# Altium PCB PCB1.PcbDoc (part 1 of 2)
Units mil, origin at the board's own origin, x right, y up, seen from the top; angles counter-clockwise.
Board outline 2698.82 x 2101.51 mil, 2 copper layers (Top Layer, Bottom Layer); 61 components, 56 nets, 231 pads, 29 vias.
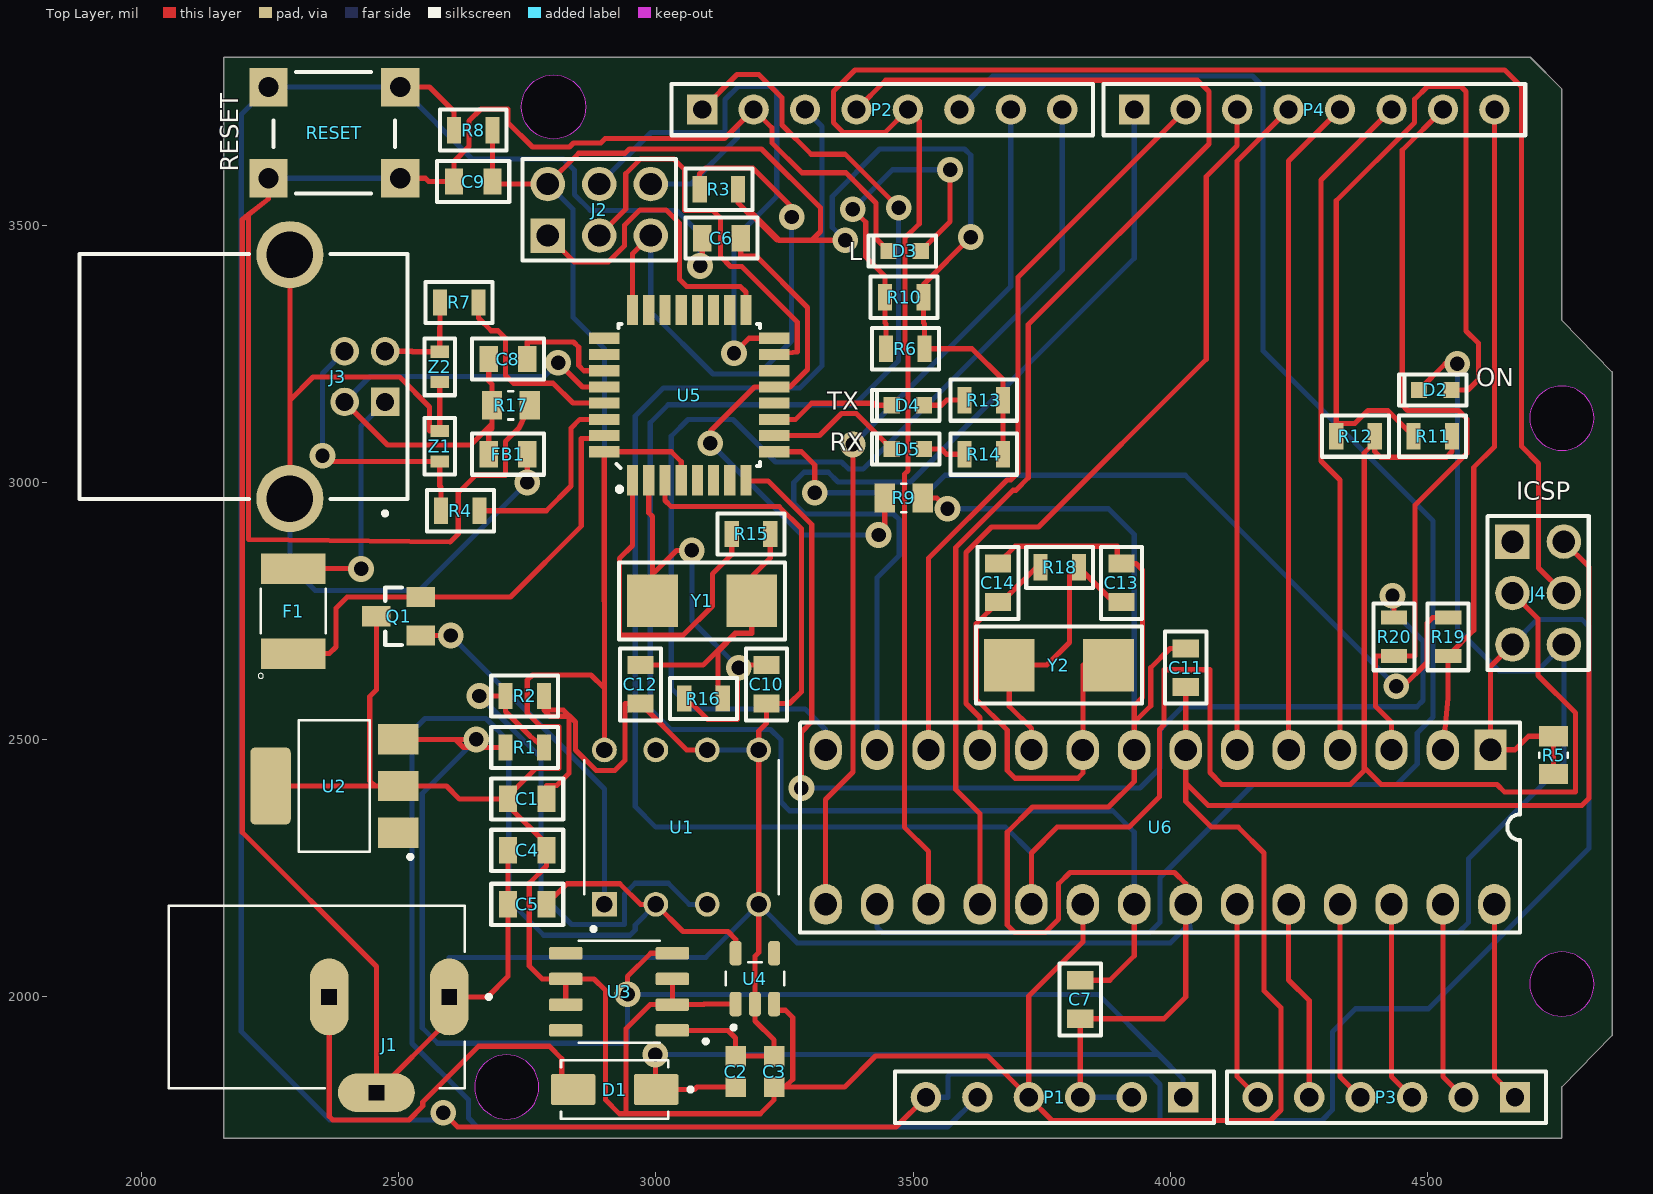
[diagram p0: Top Layer view]
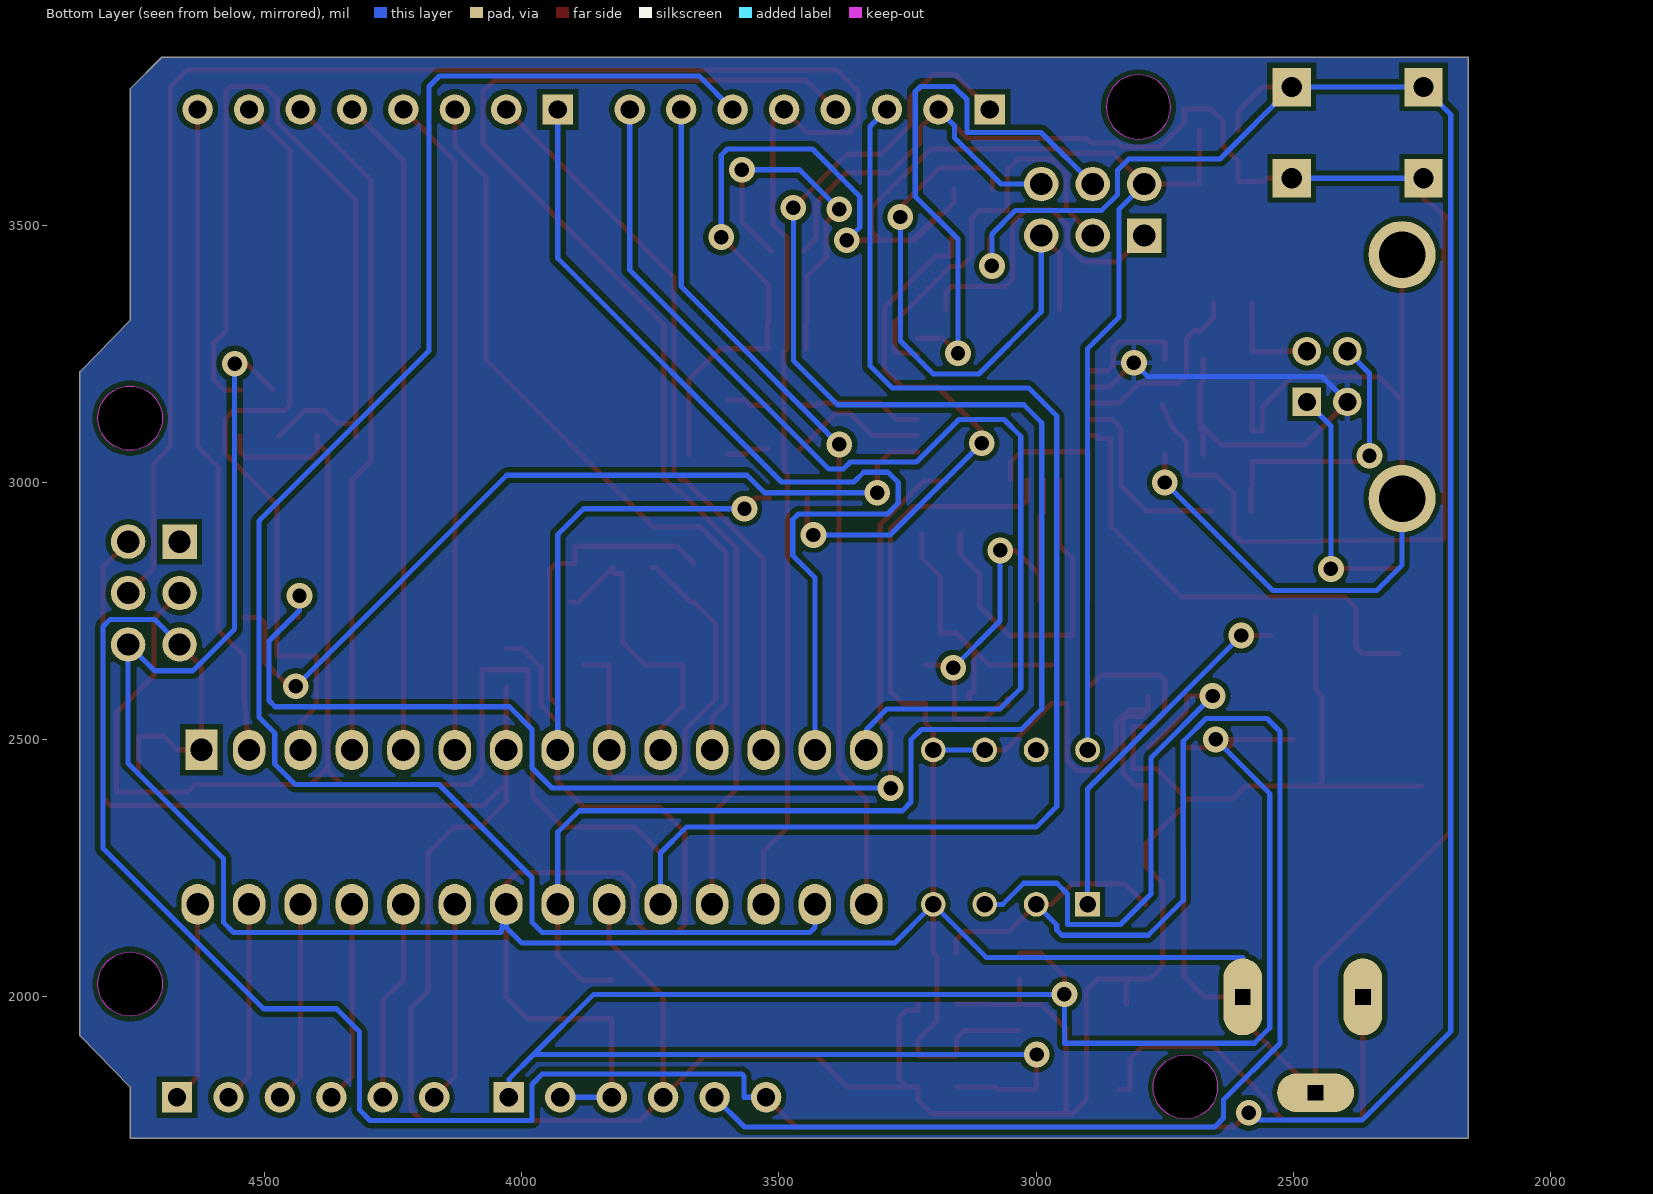
[diagram p1: Bottom Layer view, seen from below]
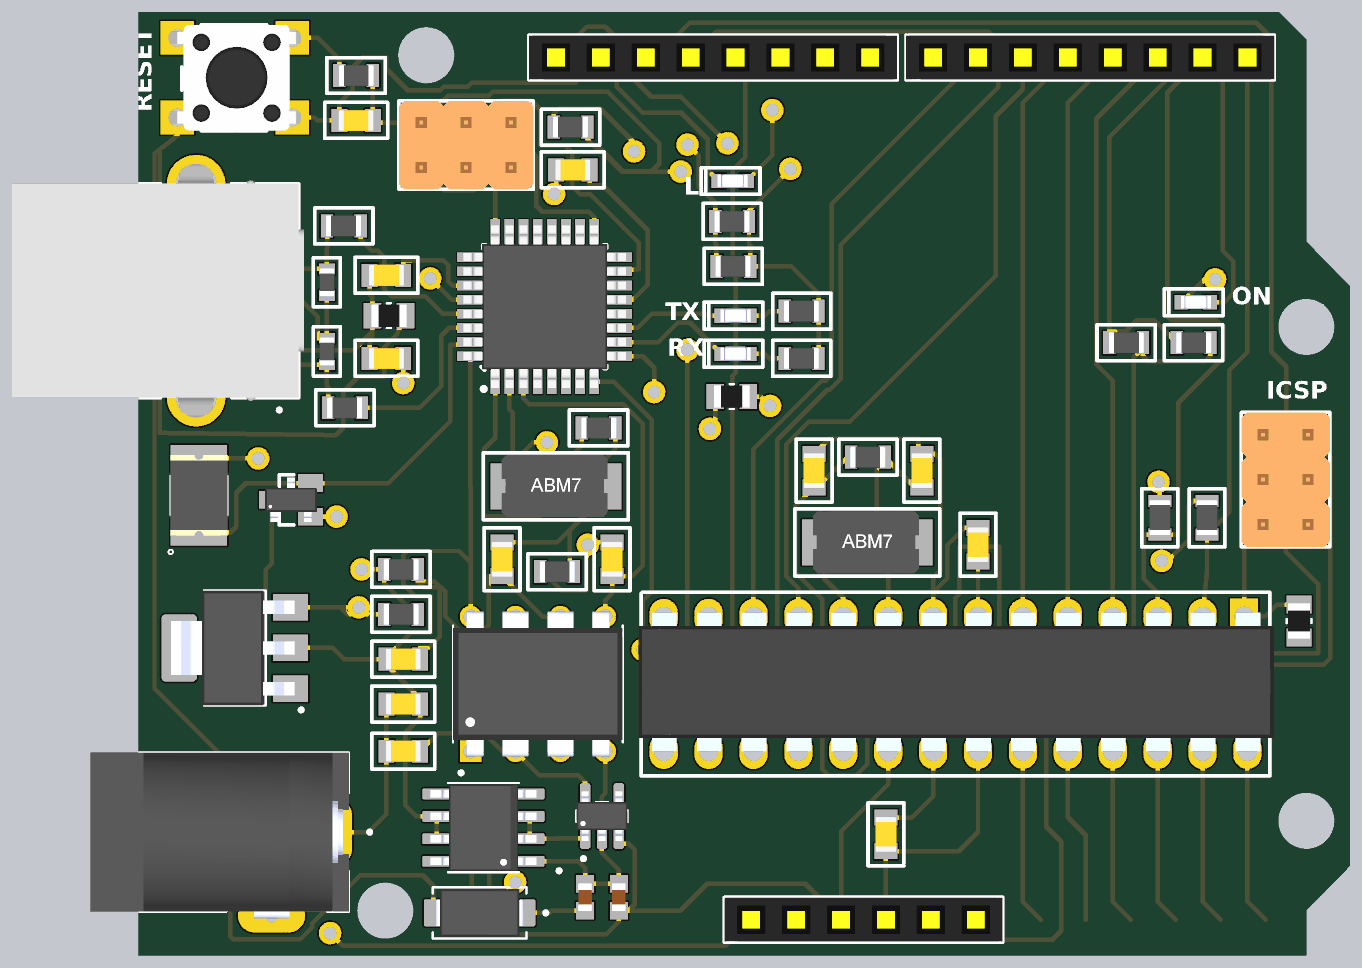
[diagram p2: 3D render of the assembled board from above, using the file's embedded part models]

## Layer stack, top to bottom
Top Solder: solder mask 0.4, Solder Resist, Dk 3.5
Top Layer: signal copper 1.4
Dielectric 1: dielectric 12.6, FR-4, Dk 4.8
Bottom Layer: signal copper 1.4
Bottom Solder: solder mask 0.4, Solder Resist, Dk 3.5

## Board outline
2160,1725 2160,3826.51 4699.58,3826.51 4761.18,3764.91 4761.18,3315 4858.82,3215 4858.82,1925 4761.18,1825 4761.18,1725
cut-out: 2801.18,3667.5 cw(c2801.18,3730) 2738.68,3730 cw(c2801.18,3730) 2801.18,3792.5 cw(c2801.18,3730) 2863.68,3730 cw(c2801.18,3730)
cut-out: 2647.5,1825 ccw(c2710,1825) 2710,1762.5 ccw(c2710,1825) 2772.5,1825 ccw(c2710,1825) 2710,1887.5 ccw(c2710,1825)
cut-out: 4698.68,2025 ccw(c4761.18,2025) 4761.18,1962.5 ccw(c4761.18,2025) 4823.68,2025 ccw(c4761.18,2025) 4761.18,2087.5 ccw(c4761.18,2025)
cut-out: 4698.68,3125 ccw(c4761.18,3125) 4761.18,3062.5 ccw(c4761.18,3125) 4823.68,3125 ccw(c4761.18,3125) 4761.18,3187.5 ccw(c4761.18,3125)

## Design rules (kind name [scope] priority, off if disabled: settings)
Clearance [All] p1: gap=10 ignorepadtopadclearanceinfootprint=FALSE
PolygonConnect [All] p1: connectstyle=Relief reliefconductorwidth=10 reliefentries=4 polygonreliefangle="90 Angle" airgapwidth=10
RoutingPriority [InNetClass('power')] p1: routingpriority=0
RoutingVias [All] p1: holewidth=28 width=50 viastyle="Through Hole" minholewidth=28 minwidth=50 maxholewidth=28 maxwidth=50
SolderMaskExpansion [All] p1: expansion=4 istentingtop=FALSE
Width [All] p1: maxlimit=10 minlimit=10 preferedwidth=10
29 further rules are at their usual default settings.

## Components (designator, comment, footprint, x,y, rotation, side; value= is the part's Value field where it differs from the comment)
C1 "100nF" C0805 2750,2385 r0 top
C2 "GRM188R60J476ME15D" CAPC1608X100N 3155,1855 r270 top
C3 "GRM188R60J476ME15D" CAPC1608X100N 3230,1855 r270 top
C4 "100nF" C0805 2750,2285 r0 top
C5 "1u/25V" C0805 2750,2180 r0 top
C6 "100nF" C0805 3127.6,3475 r0 top
C7 "100nF" C0805 3825,1995 r270 top
C8 "1u/25V" C0805 2712.6,3240 r0 top
C9 "100nF" C0805 2645,3585 r0 top
C10 "18p" C0805 3215,2607.6 r90 top
C11 "100nF" C0805 4030,2640 r270 top
C12 "18p" C0805 2970,2607.6 r90 top
C13 "18p" C0805 3905,2805 r270 top
C14 "18p" C0805 3665,2805 r270 top
D1 "M7" DIOM505270X240 2920,1820 r180 top
D2 "Orange" Orange_LED 4515,3180 r0 top
D3 "GREEN" Orange_LED 3483.5,3450 r0 top
D4 "TX" Orange_LED 3490,3150 r0 top
D5 "RX" Orange_LED 3490,3065 r0 top
F1 "FUSE" FUSM4632X85 2295,2750 r90 top
FB1 "" C0805 2712.6,3055 r180 top
J1 "PJ" MPD_EJ503A 2340.98,2000 r270 top
J2 "HDR 2x3" HDR_2x3_2.55mm 2790,3480 r90 top
J3 "USB TYPE-B" SAMTEC_USB-B-S-X-X-TH 2288.7,3205.79 r270 top
J4 "ICSP" HDR_2x3_2.55mm 4665,2885 r0 top
P1 "M-Header 6" "M-Header 6" 4965,2280 r180 top
P2 "M-Header 8" "M-Header 8" 2425,2935 r0 top
P3 "M-Header 6" "M-Header 6" 5610,2280 r180 top
P4 "M-Header 8" "M-Header 8" 3265,2935 r0 top
Q1 "FDN304P" SSOT-3 2500,2740 r90 top
R1 "10K" R0805 2745,2485 r180 top
R2 "10K" R0805 2745,2585 r180 top
R3 "10K" R0805 3122.6,3570 r0 top
R4 "22R" R0805 2620,2945 r0 top
R5 "0R" RESC2012X60N 4745,2470 r270 top
R6 "1K" R0805 3485,3260 r0 top
R7 "22R" R0805 2617.6,3350 r0 top
R8 "10K" R0805 2645,3685 r180 top
R9 "0R" RESC2012X60N 3481.81,2970 r0 top
R10 "1K" R0805 3482.6,3360 r0 top
R11 "1K" R0805 4510,3090 r180 top
R12 "1K" R0805 4360,3090 r180 top
R13 "1K" R0805 3637.4,3160 r0 top
R14 "1K" R0805 3637.4,3055 r0 top
R15 "22R" R0805 3185,2900 r180 top
R16 "1M" R0805 3092.6,2580 r180 top
R17 "0R" RESC2012X60N 2718.19,3150 r0 top
R18 "1M" R0805 3785,2835 r0 top
R19 "1K" R0805 4540,2700 r270 top
R20 "1K" R0805 4435,2700 r270 top
RESET "RESET" 1825910-6_BUTTON 2375,3680 r90 top (schematic designator Button1)
U1 "LM358N" DIP762W46P254L960H508Q8 3050,2330 r90 top
U2 "MC33269ST-3.3T3G" SOT230P700X175-4N 2375,2410 r90 top
U3 "MC33269DG" SOIC127P600X175-8N 2928.54,2010 r180 top
U4 "LP2985-33DBVR" SOT95P280X145-5N 3192.6,2035.59 r90 top
U5 "ATMEGA16U2-AU" TQFP32 3065,3170 r90 top
U6 "ATMEGA328P-PU" 27_DIP_7.62mm 4622.52,2480.39 r270 top
Y1 "ABM7-16.000MHZ-D2Y-T" Crystal_16MHz_footprint 3090,2770 r180 top
Y2 "ABM7-16.000MHZ-D2Y-T" Crystal_16MHz_footprint 3783.54,2645 r180 top
Z1 "CG0603MLC-05E" R0603 2580,3070.47 r90 top
Z2 "CG0603MLC-05E" R0603 2580,3224.53 r270 top

## Footprints (in the part's own frame and the unit in brackets; to place one, negate y for a bottom-side part, rotate by r counter-clockwise, add the part's x,y. Pads: shape width x height; smd on the part's side, far side on the other; paste and mask are expansions set on the pad)
27_DIP_7.62mm [mm]
  rect 2x1.6 hole 1.1: 1(0,0)
  oval 2x1.6 hole 1.1: 2(0.01,-2.35) 3(0.01,-4.89) 4(0.01,-7.43) 5(0.01,-9.97) 6(0.01,-12.51) 7(0.01,-15.05) 8(0.01,-17.59) 9(0.01,-20.13) 10(0.01,-22.67) 11(0.01,-25.21) 12(0.01,-27.75) 13(0.01,-30.29) 14(0.01,-32.83) 15(7.63,-32.83) 16(7.63,-30.29) 17(7.63,-27.75) 18(7.63,-25.21) 19(7.63,-22.67) 20(7.63,-20.13) 21(7.63,-17.59) 22(7.63,-15.05) 23(7.63,-12.51) 24(7.63,-9.97) 25(7.63,-7.43) 26(7.63,-4.89) 27(7.63,-2.35) 28(7.63,0.19)
  silkscreen extent -1.35,-34.1 9.02,1.46, body extent -0.23,-34.26 7.65,1.68, height 7.55
1825910-6_BUTTON [mm]
  rect 1.9x1.9 hole 1: 1(2.25,3.25) 2(2.25,-3.25) 3(-2.25,-3.25) 4(-2.25,3.25)
  silkscreen extent -3,-3 3,3, body extent -3,-4 2.99,3.8, height 5.11
C0805 [mm]
  rect 0.9x1.3 smd: 1(-0.95,0) 2(0.95,0)
  silkscreen extent -1.78,-1.02 1.78,1.02, body extent -1,-0.6 1,0.6, height 0.95
CAPC1608X100N [mm]
  rect 1x1.02 smd: 1(-0.759,0) 2(0.759,0)
  body extent -0.8,-0.4 0.8,0.4, height 1
Crystal_16MHz_footprint [mm]
  rect 2.5x2.6 smd: 1(-2.45,0) 2(2.45,0)
  silkscreen extent -4.1,-1.9 4.1,1.9, body extent -2.93,-1.76 3.07,1.74, height 1.41
DIOM505270X240 [mm]
  rrect15% 2.21x1.53 smd: A(2.05,0) C(-2.05,0)
  silkscreen extent -3.85,-1.45 2.65,1.45, body extent -2.5,-1.35 2.5,1.35, height 2.2
DIP762W46P254L960H508Q8 [mm]
  rect 1.22x1.22 / inner round 1.22 / far side rect 1.22x1.22 hole 0.81: 1(-3.81,3.81)
  round 1.22 hole 0.81: 2(-3.81,1.27) 3(-3.81,-1.27) 4(-3.81,-3.81) 5(3.81,-3.81) 6(3.81,-1.27) 7(3.81,1.27) 8(3.81,3.81)
  silkscreen extent -5.13,-4.8 3.3,4.8, body extent -4.1,-4.79 4.1,4.79, height 5.08
FUSM4632X85 [mm]
  rect 1.5x3.2 smd: 1(-2.1,0) 2(2.1,0)
  silkscreen extent -3.33,-1.6 1.1,1.73, body extent -2.27,-1.62 2.27,1.62, height 1.1
HDR_2x3_2.55mm [mm]
  rect 1.7x1.7 hole 1.1: 1(0,0)
  round 1.7 hole 1.1: 2(2.54,0) 3(0,-2.54) 4(2.54,-2.54) 5(0,-5.08) 6(2.54,-5.08)
  silkscreen extent -1.23,-6.34 3.77,1.26, body extent -1.23,-6.35 3.77,1.27, height 8.01
"M-Header 6" [mm]
  rect 1.5x1.5 hole 0.9: 1(23.876,12.065)
  round 1.5 hole 0.9: 2(26.416,12.065) 3(28.956,12.065) 4(31.496,12.065) 5(34.036,12.065) 6(36.576,12.065)
  silkscreen extent 22.35,10.8 38.1,13.34, body extent 22.36,10.81 38.1,13.31, height 5
"M-Header 8" [mm]
  rect 1.5x1.5 hole 0.9: 1(16.891,20.066)
  round 1.5 hole 0.9: 2(19.431,20.066) 3(21.971,20.066) 4(24.511,20.066) 5(27.051,20.066) 6(29.591,20.066) 7(32.131,20.066) 8(34.671,20.066)
  silkscreen extent 15.37,18.8 36.2,21.34, body extent 15.37,18.82 36.19,21.32, height 5
MPD_EJ503A [mm]
  oval 3.8x1.9 hole 0.76 square: 1(0,6.54) 2(0,0.61)
  oval 1.9x3.8 hole 0.76 square: 3(4.73,2.94)
  silkscreen extent -4.5,-7.31 4.5,8.59, body extent -4.5,-7.31 4.88,7.31, height 11
Orange_LED [mm]
  rect 0.8x0.8 smd: 1(-0.8,0) 2(0.8,0)
  silkscreen extent -1.78,-0.76 1.55,0.76, body extent -0.85,-0.39 0.85,0.41, height 0.66
R0603 [mm]
  rect 0.6x0.9 smd: 1(-0.75,0) 2(0.75,0)
  silkscreen extent -1.4,-0.76 1.4,0.76, body extent -0.8,-0.42 0.8,0.42, height 0.81
R0805 [mm]
  rect 0.7x1.3 smd: 1(-0.95,0) 2(0.95,0)
  silkscreen extent -1.65,-1.02 1.65,1.02, body extent -1.01,-0.6 0.99,0.6, height 0.71
RESC2012X60N [mm]
  rect 1x1.42 smd: 1(-0.935,0) 2(0.935,0)
  silkscreen extent -0.12,-0.7 0.12,0.7, body extent -1,-0.63 1,0.63, height 0.6
SAMTEC_USB-B-S-X-X-TH [mm]
  rect 1.408x1.408 / inner round 1.408 / far side rect 1.408x1.408 hole 0.9: 1(1.25,4.7)
  round 1.408 hole 0.9: 2(-1.25,4.7) 3(-1.25,2.7) 4(1.25,2.7)
  round 3.316 hole 2.3: S1(-6.02,0) S2(6.02,0)
  silkscreen extent -6.05,-10.4 6.85,5.8, body extent -7.25,-10.4 7.25,6.1, height 10.7
SOIC127P600X175-8N [mm]
  rrect25% 1.65x0.61 smd: 1(-2.63,1.905) 2(-2.63,0.635) 3(-2.63,-0.635) 4(-2.63,-1.905) 5(2.63,-1.905) 6(2.63,-0.635) 7(2.63,0.635) 8(2.63,1.905)
  silkscreen extent -4.38,-2.52 2,2.54, body extent -3,-2.45 3,2.45, height 1.75
SOT95P280X145-5N [mm]
  rrect50% 1.21x0.59 smd: 1(-1.255,0.95) 2(-1.255,0) 3(-1.255,-0.95) 4(1.255,-0.95) 5(1.255,0.95)
  silkscreen extent -2.51,-1.45 0.8,1.45, body extent -1.4,-1.45 1.4,1.45, height 1.45
SOT230P700X175-4N [mm]
  rect 1.5x2 smd: 1(-2.3,-3.15) 2(0,-3.15) 3(2.3,-3.15)
  rrect24% 3.8x2 smd: 4(0,3.15)
  silkscreen extent -3.6,-3.85 3.25,1.75, body extent -3.25,-3.37 3.25,3.63, height 1.75
SSOT-3 [mm]
  rect 1x1.4 smd: 1(-0.95,-1.1) 2(0.95,-1.1) 3(0,1.1)
  silkscreen extent -1.42,-0.15 1.42,0.66, body extent -1.25,-1.46 1.25,1.46, height 1.12
TQFP32 [mm]
  rect 1.5x0.55 smd paste+0 mask+0.06: 1(-4.2,2.8) 2(-4.2,2) 3(-4.2,1.2) 4(-4.2,0.4) 5(-4.2,-0.4) 6(-4.2,-1.2) 7(-4.2,-2) 8(-4.2,-2.8) 17(4.2,-2.8) 18(4.2,-2) 19(4.2,-1.2) 20(4.2,-0.4) 21(4.2,0.4) 22(4.2,1.2) 23(4.2,2) 24(4.2,2.8)
  rect 0.55x1.5 smd paste+0 mask+0.06: 9(-2.8,-4.2) 10(-2,-4.2) 11(-1.2,-4.2) 12(-0.4,-4.2) 13(0.4,-4.2) 14(1.2,-4.2) 15(2,-4.2) 16(2.8,-4.2) 25(2.8,4.2) 26(2,4.2) 27(1.2,4.2) 28(0.4,4.2) 29(-0.4,4.2) 30(-1.2,4.2) 31(-2,4.2) 32(-2.8,4.2)
  silkscreen extent -4.75,-3.5 3.5,3.6, body extent -4.6,-4.6 4.6,4.6, height 1.2

## Part data
C1 C4 C6 C7 C9 C11: library part C2012X7R1H104K085AA, "TDK - C2012X7R1H104K085AA - SMD Multilayer Ceramic Capacitor, 0.1 µF, 50 V, 0805 [2012 Metric], ± 10%, X7R, C Series", Case Code (Imperial)=0805, Case Code (Metric)=2012, Dielectric=X7R, Dielectric Material=Ceramic, Manufacturer=TDK, Max Operating Temperature=125°C, Min Operating Temperature=-55°C, Package Quantity=1, Supplier Part Number 1=445-7534-1-ND, Tolerance=10%, Voltage=50V, Capacitance=100nF, Case/Package=0805, Category="Ceramic Capacitors", ComponentLink1Description=https://datasheet.ciiva.com/11788/0900766b80c1bb00-11788128.pdf?src-supplier=RSComponents, ComponentLink1URL=https://datasheet.ciiva.com/11788/0900766b80c1bb00-11788128.pdf?src-supplier=RSComponents, ComponentLink2Description=https://datasheet.ciiva.com/6250/tdkmlcccaprange-6250821.pdf?src-supplier=Digi-Key, ComponentLink2URL=https://datasheet.ciiva.com/6250/tdkmlcccaprange-6250821.pdf?src-supplier=Digi-Key, ComponentLink3Description=https://datasheet.ciiva.com/24191/e412-c-24191447.pdf?src-supplier=Future+Electronics, ComponentLink3URL=https://datasheet.ciiva.com/24191/e412-c-24191447.pdf?src-supplier=Future+Electronics, ComponentLink4Description=https://datasheet.ciiva.com/6250/tdkmlcccaprange-6250824.pdf?src-supplier=Digi-Key, ComponentLink4URL=https://datasheet.ciiva.com/6250/tdkmlcccaprange-6250824.pdf?src-supplier=Digi-Key, ComponentLink5Description=https://datasheet.ciiva.com/23803/1796654-23803035.pdf?src-supplier=Newark, ComponentLink5URL=https://datasheet.ciiva.com/23803/1796654-23803035.pdf?src-supplier=Newark, ComponentLink6Description=https://datasheet.ciiva.com/28602/1571323-28602204.pdf?src-supplier=Element14, ComponentLink6URL=https://datasheet.ciiva.com/28602/1571323-28602204.pdf?src-supplier=Element14, Composition=Ceramic, Depth=1.25mm, Height=0.85mm, Lead Free="Lead Free", Length=2mm, Manufacturer Part Number=C2012X7R1H104K085AA, Mount="Surface Mount", Number of Pins=2, Packaging="Tape and Reel", Pricing 1="1=0,16000, 10=0,11400, 50=0,06480, 100=0,05370, 500=0,03764, 1000=0,03116 (USD)", Radiation Hardening=No, REACH SVHC="No SVHC", RoHS=Yes, Stock 1=4, Supplier 1=Digi-Key, Termination=SMD/SMT, Thickness=0.037inch, Voltage Rating=50V, Voltage Rating (DC)=50V, Weight=0.000194oz, Width=0.049inch
C2 C3: "SMD capacitor X5R(EIA) with capacitance 47uF Tol.20%. Rated voltage 6.3Vdc 85C", Package="1608 Murata", Check_prices=https://www.snapeda.com/parts/GRM188R60J476ME15D/Murata/view-part/?ref=eda, MF=Murata, MP=GRM188R60J476ME15D, SnapEDA_Link=https://www.snapeda.com/parts/GRM188R60J476ME15D/Murata/view-part/?ref=snap
C5 C8: library part C2012X5R1E105K125AA, "TDK - C2012X5R1E105K125AA - SMD Multilayer Ceramic Capacitor, 1 µF, 25 V, 0805 [2012 Metric], ± 10%, X5R, C Series", Capacitance=1uF, Case Code (Imperial)=0805, Case Code (Metric)=2012, Dielectric=X5R, Dielectric Material=Ceramic, Manufacturer=TDK, Max Operating Temperature=85°C, Min Operating Temperature=-55°C, Package Quantity=2000, Supplier Part Number 1=445-1419-1-ND, Tolerance=10%, Voltage=25V, Case/Package=0805, Category="Ceramic Capacitors", ComponentLink1Description=https://datasheet.ciiva.com/11787/0900766b80c1bb00-11787608.pdf?src-supplier=RSComponents, ComponentLink1URL=https://datasheet.ciiva.com/11787/0900766b80c1bb00-11787608.pdf?src-supplier=RSComponents, ComponentLink2Description=https://datasheet.ciiva.com/16449/e412-c-16449595.pdf?src-supplier=Future+Electronics, ComponentLink2URL=https://datasheet.ciiva.com/16449/e412-c-16449595.pdf?src-supplier=Future+Electronics, ComponentLink3Description=https://datasheet.ciiva.com/28602/1744655-28602171.pdf?src-supplier=Element14, ComponentLink3URL=https://datasheet.ciiva.com/28602/1744655-28602171.pdf?src-supplier=Element14, ComponentLink4Description=https://datasheet.ciiva.com/15192/getdatasheetpartid-726707-15192140.pdf?src-supplier=Verical, ComponentLink4URL=https://datasheet.ciiva.com/15192/getdatasheetpartid-726707-15192140.pdf?src-supplier=Verical, Composition=Ceramic, Depth=1.25mm, Height=1.25mm, Lead Free="Lead Free", Length=2mm, Manufacturer Part Number=C2012X5R1E105K125AA, Mount="Surface Mount", Number of Pins=2, Packaging="Tape and Reel", Pricing 1="1=0,26000, 10=0,17400, 50=0,10460, 100=0,08830, 500=0,06040, 1000=0,05343 (USD)", Radiation Hardening=No, REACH SVHC="No SVHC", RoHS=Yes, Stock 1=11809, Supplier 1=Digi-Key, Termination=SMD/SMT, Thickness=0.057inch, Voltage Rating=25V, Voltage Rating (DC)=25V, Weight=0.000194oz, Width=0.049inch
C10 C12 C13 C14: library part C0805C180J5GACTU, "CAP CER 18PF 50V C0G/NP0 0805", Capacitance=18pF, Case/Package=0805, Dielectric=C0G, Dielectric Material=Ceramic, Manufacturer=KEMET, Max Operating Temperature=125°C, Min Operating Temperature=-55°C, Supplier Part Number 1=399-1112-1-ND, Temperature Coefficient=30ppm/°C, Tolerance=5%, Voltage=50V, Category="Ceramic Capacitors", ComponentLink1Description=https://datasheet.ciiva.com/22746/1769375-22746770.pdf?src-supplier=Element14, ComponentLink1URL=https://datasheet.ciiva.com/22746/1769375-22746770.pdf?src-supplier=Element14, ComponentLink2Description=https://datasheet.ciiva.com/26923/getdatasheetpartid-759702-26923980.pdf?src-supplier=Verical, ComponentLink2URL=https://datasheet.ciiva.com/26923/getdatasheetpartid-759702-26923980.pdf?src-supplier=Verical, ComponentLink3Description=https://datasheet.ciiva.com/26847/getdatasheetpartid-385668-26847862.pdf?src-supplier=Verical, ComponentLink3URL=https://datasheet.ciiva.com/26847/getdatasheetpartid-385668-26847862.pdf?src-supplier=Verical, Contact Plating=Tin,Matte, Depth=1.25mm, Height=0.78mm, Lead Free="Lead Free", Length=2mm, Manufacturer Part Number=C0805C180J5GACTU, Mount="Surface Mount", Packaging="Tape and Reel", Pricing 1="1=0,13000, 10=0,09500, 50=0,05400, 100=0,04470, 500=0,03136, 1000=0,02597 (USD)", Radiation Hardening=No, RoHS=Yes, Stock 1=124325, Supplier 1=Digi-Key, Termination=SMD/SMT, Voltage Rating (DC)=50V
D1: "Diode, SMA, 1000V, 1A, 150Â°C", Package="DO-214AC Diotec", Check_prices=https://www.snapeda.com/parts/M7/Diotec/view-part/?ref=eda, MF="Diotec Semiconductor", MP=M7, SnapEDA_Link=https://www.snapeda.com/parts/M7/Diotec/view-part/?ref=snap
D2: library part LOL29K-H2K1-24-Z, "OSRAM - LO L29K-H2K1-24-Z - SMARTLED 0603 ORANGE", Case Code (Imperial)=0603, Case Code (Metric)=1608, Forward Current=20mA, Forward Voltage=2.2V, Lens Color=White, Manufacturer="Osram Opto", Max Operating Temperature=100°C, Min Operating Temperature=-40°C, Package Quantity=5000, Reverse Voltage=12V, Supplier Part Number 1=475-2740-1-ND, Test Current=2mA, Case/Package=0603, Category=Uncategorized, Color=Orange, ComponentLink1Description=https://datasheet.ciiva.com/2112/00077105-0-2112904.pdf?src-supplier=Digi-Key, ComponentLink1URL=https://datasheet.ciiva.com/2112/00077105-0-2112904.pdf?src-supplier=Digi-Key, ComponentLink2Description=https://datasheet.ciiva.com/2112/00077105-0-2112905.pdf?src-supplier=Digi-Key, ComponentLink2URL=https://datasheet.ciiva.com/2112/00077105-0-2112905.pdf?src-supplier=Digi-Key, ComponentLink3Description=https://datasheet.ciiva.com/2112/00077105-0-2112906.pdf?src-supplier=Digi-Key, ComponentLink3URL=https://datasheet.ciiva.com/2112/00077105-0-2112906.pdf?src-supplier=Digi-Key, ComponentLink4Description=https://datasheet.ciiva.com/15198/getdatasheetpartid-693885-15198412.pdf?src-supplier=Verical, ComponentLink4URL=https://datasheet.ciiva.com/15198/getdatasheetpartid-693885-15198412.pdf?src-supplier=Verical, Depth=0.8mm, Dominant Wavelength=606nm, Height=0.65mm, Illumination Color=Orange, Length=1.3mm, Lens Size=0.8mm, Lens Style=Flat,Diffused,Colorless,Rectangular, Lens Transparency=Diffused, Luminous Flux=0.025lm, Luminous Intensity=9mcd, Manufacturer Part Number=LOL29K-H2K1-24-Z, Mount="Surface Mount", Number of Elements=1, Number of LEDs=1, Number of Pins=2, Packaging="Tape and Reel", Radiation Hardening=No, RoHS=Yes, Supplier 1=Digi-Key, Viewing Angle=160°, Width=0.8mm
D3: library part LGL29K-G2J1-24-Z, "LED Uni-Color Green 572nm 2-Pin Chip 0603(1608Metric) T/R", Case Code (Imperial)=0603, Case Code (Metric)=1608, Color=Green, Forward Current=20mA, Forward Voltage=2.2V, Lens Color=White, Manufacturer="Osram Opto", Max Operating Temperature=100°C, Min Operating Temperature=-40°C, Package Quantity=5000, Reverse Voltage=12V, Supplier Part Number 1=475-2709-1-ND, Test Current=2mA, Case/Package=0603, Category=Uncategorized, ComponentLink1Description=https://datasheet.ciiva.com/4689/g-l29k-39844-4689584.pdf?src-supplier=Mouser, ComponentLink1URL=https://datasheet.ciiva.com/4689/g-l29k-39844-4689584.pdf?src-supplier=Mouser, ComponentLink2Description=https://datasheet.ciiva.com/15198/getdatasheetpartid-571127-15198411.pdf?src-supplier=Verical, ComponentLink2URL=https://datasheet.ciiva.com/15198/getdatasheetpartid-571127-15198411.pdf?src-supplier=Verical, ComponentLink3Description=https://datasheet.ciiva.com/2112/00077107-0-2112886.pdf?src-supplier=Digi-Key, ComponentLink3URL=https://datasheet.ciiva.com/2112/00077107-0-2112886.pdf?src-supplier=Digi-Key, ComponentLink4Description=https://datasheet.ciiva.com/2112/00077107-0-2112887.pdf?src-supplier=Digi-Key, ComponentLink4URL=https://datasheet.ciiva.com/2112/00077107-0-2112887.pdf?src-supplier=Digi-Key, ComponentLink5Description=https://datasheet.ciiva.com/2112/00077107-0-2112888.pdf?src-supplier=Digi-Key, ComponentLink5URL=https://datasheet.ciiva.com/2112/00077107-0-2112888.pdf?src-supplier=Digi-Key, Depth=0.8mm, Dominant Wavelength=570nm, Height=0.65mm, Illumination Color=Green, Length=1.3mm, Lens Size=0.8mm, Lens Style=Flat,Diffused,Colorless,Rectangular, Lens Transparency=Diffused, Luminous Flux=0.012lm, Luminous Intensity=5.6mcd, Manufacturer Part Number=LGL29K-G2J1-24-Z, Mount="Surface Mount", Number of Elements=1, Number of LEDs=1, Number of Pins=2, Packaging="Tape and Reel", Pricing 1="1=0,42000, 10=0,30400, 100=0,19830, 500=0,14250, 1000=0,11153, 2500=0,10224 (USD)", Radiation Hardening=No, RoHS=Yes, Stock 1=7561, Supplier 1=Digi-Key, Viewing Angle=160°, Width=0.8mm
D4 D5: library part LOL29K-H2K1-24-Z, "OSRAM - LO L29K-H2K1-24-Z - SMARTLED 0603 ORANGE", Case Code (Imperial)=0603, Case Code (Metric)=1608, Color=Orange, Forward Current=20mA, Forward Voltage=2.2V, Lens Color=White, Manufacturer="Osram Opto", Max Operating Temperature=100°C, Min Operating Temperature=-40°C, Package Quantity=5000, Reverse Voltage=12V, Supplier Part Number 1=475-2740-1-ND, Test Current=2mA, Case/Package=0603, Category=Uncategorized, ComponentLink1Description=https://datasheet.ciiva.com/2112/00077105-0-2112904.pdf?src-supplier=Digi-Key, ComponentLink1URL=https://datasheet.ciiva.com/2112/00077105-0-2112904.pdf?src-supplier=Digi-Key, ComponentLink2Description=https://datasheet.ciiva.com/2112/00077105-0-2112905.pdf?src-supplier=Digi-Key, ComponentLink2URL=https://datasheet.ciiva.com/2112/00077105-0-2112905.pdf?src-supplier=Digi-Key, ComponentLink3Description=https://datasheet.ciiva.com/2112/00077105-0-2112906.pdf?src-supplier=Digi-Key, ComponentLink3URL=https://datasheet.ciiva.com/2112/00077105-0-2112906.pdf?src-supplier=Digi-Key, ComponentLink4Description=https://datasheet.ciiva.com/15198/getdatasheetpartid-693885-15198412.pdf?src-supplier=Verical, ComponentLink4URL=https://datasheet.ciiva.com/15198/getdatasheetpartid-693885-15198412.pdf?src-supplier=Verical, Depth=0.8mm, Dominant Wavelength=606nm, Height=0.65mm, Illumination Color=Orange, Length=1.3mm, Lens Size=0.8mm, Lens Style=Flat,Diffused,Colorless,Rectangular, Lens Transparency=Diffused, Luminous Flux=0.025lm, Luminous Intensity=9mcd, Manufacturer Part Number=LOL29K-H2K1-24-Z, Mount="Surface Mount", Number of Elements=1, Number of LEDs=1, Number of Pins=2, Packaging="Tape and Reel", Radiation Hardening=No, RoHS=Yes, Supplier 1=Digi-Key, Viewing Angle=160°, Width=0.8mm
F1: "Polymeric PTC Resettable Fuse 15V 500 mA Ih Surface Mount 1812 (4532 Metric), Concave", Package="1812 Bourns", Availability="In Stock", Check_prices=https://www.snapeda.com/parts/MF-MSMF050-2/Bourns+-+J.W.+Miller/view-part/?ref=eda, MF=Bourns, MP=MF-MSMF050-2, Price=None, Purchase-URL=https://pricing.snapeda.com/search/part/MF-MSMF050-2/?ref=eda, SnapEDA_Link=https://www.snapeda.com/parts/MF-MSMF050-2/Bourns+-+J.W.+Miller/view-part/?ref=snap
FB1: library part MPZ2012S601AT000, "FERRITE BEAD 600 OHM 0805 1LN", Case Code (Imperial)=0805, Case Code (Metric)=2012, Current Rating=2A, DC Resistance (DCR)=100mR, Manufacturer=TDK, Package Quantity=1, Supplier Part Number 1=445-2206-2-ND, Case/Package=0805, Category="Ferrite Beads and Chips", ComponentLink1Description=https://datasheet.ciiva.com/46634/beads-commercial-power-mpz-en-46634377.pdf?src-supplier=Digi-Key, ComponentLink1URL=https://datasheet.ciiva.com/46634/beads-commercial-power-mpz-en-46634377.pdf?src-supplier=Digi-Key, ComponentLink2Description=https://datasheet.ciiva.com/46634/beads-commercial-power-mpz-en-46634606.pdf?src-supplier=Digi-Key, ComponentLink2URL=https://datasheet.ciiva.com/46634/beads-commercial-power-mpz-en-46634606.pdf?src-supplier=Digi-Key, ComponentLink3Description=https://datasheet.ciiva.com/46634/beads-commercial-power-mpz-en-46634335.pdf?src-supplier=Digi-Key, ComponentLink3URL=https://datasheet.ciiva.com/46634/beads-commercial-power-mpz-en-46634335.pdf?src-supplier=Digi-Key, Height=0.041inch, Impedance=600R, Lead Free="Lead Free", Length=0.079inch, Manufacturer Part Number=MPZ2012S601AT000, Max DC Current=2A, Mount="Surface Mount", Packaging="Tape and Reel", Pricing 1="4000=0,027450, 8000=0,025620, 12000=0,023790, 28000=0,023520, 100000=0,022880 (USD)", REACH SVHC="No SVHC", RoHS=Yes, Stock 1=181570, Supplier 1=Digi-Key, Width=0.049inch
J1: "Power Barrel Connector Jack 2.10mm ID (0.083), 5.50mm OD (0.217) Through Hole, Right Angle", Package=None, Availability="In Stock", Check_prices=https://www.snapeda.com/parts/EJ503A/MPD+%2528Memory+Protection+Devices%2529/view-part/?ref=eda, MF=MPD, MP=EJ503A, Price=None, Purchase-URL=https://pricing.snapeda.com/search?q=EJ503A&ref=eda, SnapEDA_Link=https://www.snapeda.com/parts/EJ503A/MPD+%2528Memory+Protection+Devices%2529/view-part/?ref=snap
J2 J4: library part 67997-106HLF, "CONN HEADER 6POS .100 STR 30AU", Color=Black, Current Rating=3A, Flammability Rating="UL94 V-0", Insulation Resistance=5GR, Manufacturer="Amphenol FCI", Max Operating Temperature=125°C, Max Voltage Rating (AC)=1.5kV, Min Operating Temperature=-65°C, Package Quantity=100, Supplier Part Number 1=609-3393-ND, Category="Headers and Wire Housings", ComponentLink1Description=https://datasheet.ciiva.com/5153/67996-222463-5153820.pdf?src-supplier=Mouser, ComponentLink1URL=https://datasheet.ciiva.com/5153/67996-222463-5153820.pdf?src-supplier=Mouser, ComponentLink2Description=https://datasheet.ciiva.com/16726/67996-16726286.pdf?src-supplier=Avnet+Europe, ComponentLink2URL=https://datasheet.ciiva.com/16726/67996-16726286.pdf?src-supplier=Avnet+Europe, ComponentLink3Description=https://datasheet.ciiva.com/722/67996-722044.pdf?src-supplier=Digi-Key, ComponentLink3URL=https://datasheet.ciiva.com/722/67996-722044.pdf?src-supplier=Digi-Key, ComponentLink4Description=https://datasheet.ciiva.com/10149/67996-10149221.pdf?src-supplier=Avnet, ComponentLink4URL=https://datasheet.ciiva.com/10149/67996-10149221.pdf?src-supplier=Avnet, ComponentLink5Description=https://datasheet.ciiva.com/46393/1876884-46393067.pdf?src-supplier=Element14, ComponentLink5URL=https://datasheet.ciiva.com/46393/1876884-46393067.pdf?src-supplier=Element14, Connector Type="Male Pin", Contact Gender=Male, Contact Material=Bronze, Contact Mating Length=0.23inch, Contact Plating=Gold,GXT, Contact Post Length=3.05mm, Depth=4.83mm, Gender=Male, Housing Color=Black, Housing Material=Thermoplastic, Lead Free="Lead Free", Length=7.62mm, Manufacturer Part Number=67997-106HLF, Mount="Through Hole", Number of Contacts=6, Number of Positions=6, Number of Rows=2, Orientation=Straight, Packaging=Bulk, Pitch=2.54mm, Pricing 1="1=1,78000, 10=1,61400, 100=1,38370, 500=1,15308, 1000=0,98835, 5000=0,87634, 10000=0,85657 (USD)", Radiation Hardening=No, REACH SVHC="No SVHC", RoHS=Yes, Row Spacing=0.1inch, Stock 1=1387, Supplier 1=Digi-Key, Termination="Through Hole", Voltage Rating=1.5kV
J3: "USB-B (USB TYPE-B) USB 2.0 Receptacle Connector 4 Position Through Hole, Right Angle", Package=None, Check_prices=https://www.snapeda.com/parts/USB-B-S-F-W-TH-TR/Samtec/view-part/?ref=eda, MF=Samtec, MP=USB-B-S-F-W-TH-TR, SnapEDA_Link=https://www.snapeda.com/parts/USB-B-S-F-W-TH-TR/Samtec/view-part/?ref=snap
Q1: "P-Channel 20 V 2.4A (Ta) 500mW (Ta) Surface Mount SOT-23-3", Package="SOT-23-3 ON Semiconductor", Check_prices=https://www.snapeda.com/parts/FDN304P/Onsemi/view-part/?ref=eda, MF=onsemi, MP=FDN304P, SnapEDA_Link=https://www.snapeda.com/parts/FDN304P/Onsemi/view-part/?ref=snap
R1 R2 R3 R8: library part RC0805FR-0710KL, "RES SMD 10K OHM 1% 1/8W 0805", Case Code (Imperial)=0805, Case Code (Metric)=2012, Manufacturer=Yageo, Max Operating Temperature=155°C, Max Power Dissipation=125mW, Min Operating Temperature=-55°C, Package Quantity=1, Resistance=10kR, Supplier Part Number 1=311-10.0KCRDKR-ND, Temperature Coefficient=100ppm/°C, Tolerance=1%, Voltage Rating=150V, Case/Package=0805, Category="Chip SMD Resistors", ComponentLink1Description=https://datasheet.ciiva.com/11808/0900766b8106beab-11808151.pdf?src-supplier=RSComponents, ComponentLink1URL=https://datasheet.ciiva.com/11808/0900766b8106beab-11808151.pdf?src-supplier=RSComponents, ComponentLink2Description=https://datasheet.ciiva.com/12669/rc0805-12669688.pdf?src-supplier=Mouser, ComponentLink2URL=https://datasheet.ciiva.com/12669/rc0805-12669688.pdf?src-supplier=Mouser, ComponentLink3Description=https://datasheet.ciiva.com/46447/444164-46447563.pdf?src-supplier=Element14, ComponentLink3URL=https://datasheet.ciiva.com/46447/444164-46447563.pdf?src-supplier=Element14, ComponentLink4Description=https://datasheet.ciiva.com/2456/pyu-r-int-thick-7-2456972.pdf?src-supplier=Digi-Key, ComponentLink4URL=https://datasheet.ciiva.com/2456/pyu-r-int-thick-7-2456972.pdf?src-supplier=Digi-Key, ComponentLink5Description=https://datasheet.ciiva.com/2456/pyu-r-int-thick-7-2456973.pdf?src-supplier=Digi-Key, ComponentLink5URL=https://datasheet.ciiva.com/2456/pyu-r-int-thick-7-2456973.pdf?src-supplier=Digi-Key, ComponentLink6Description=https://datasheet.ciiva.com/2456/pyu-r-int-thick-7-2456974.pdf?src-supplier=Digi-Key, ComponentLink6URL=https://datasheet.ciiva.com/2456/pyu-r-int-thick-7-2456974.pdf?src-supplier=Digi-Key, ComponentLink7Description=https://datasheet.ciiva.com/16747/rc0805-16747087.pdf?src-supplier=Future+Electronics, ComponentLink7URL=https://datasheet.ciiva.com/16747/rc0805-16747087.pdf?src-supplier=Future+Electronics, Composition="Thick Film", Depth=1.25mm, Features="Moisture Resistant", Height=0.024inch, Lead Free="Lead Free", Length=2mm, Manufacturer Part Number=RC0805FR-0710KL, Military Standard=Not, Number of Terminations=2, Packaging="Tape and Reel", Power Rating=125mW, Pricing 1="1=0,10000, 10=0,03900, 100=0,01570, 1000=0,00705, 2500=0,00612 (USD)", REACH SVHC=Unknown, RoHS=Yes, Stock 1=19610411, Supplier 1=Digi-Key, Termination=SMD/SMT, Width=0.049inch
R4 R7 R15: library part RC0805FR-0722RL, "RES SMD 22 OHM 1% 1/8W 0805", Case Code (Imperial)=0805, Case Code (Metric)=2012, Manufacturer=Yageo, Max Operating Temperature=155°C, Max Power Dissipation=125mW, Min Operating Temperature=-55°C, Package Quantity=1, Supplier Part Number 1=311-22.0CRCT-ND, Temperature Coefficient=100ppm/°C, Tolerance=1%, Voltage Rating=150V, Case/Package=0805, Category="Chip SMD Resistors", ComponentLink1Description=https://datasheet.ciiva.com/11819/0900766b8106beab-11819837.pdf?src-supplier=RSComponents, ComponentLink1URL=https://datasheet.ciiva.com/11819/0900766b8106beab-11819837.pdf?src-supplier=RSComponents, ComponentLink2Description=https://datasheet.ciiva.com/2457/pyu-r-int-thick-7-2457044.pdf?src-supplier=Digi-Key, ComponentLink2URL=https://datasheet.ciiva.com/2457/pyu-r-int-thick-7-2457044.pdf?src-supplier=Digi-Key, ComponentLink3Description=https://datasheet.ciiva.com/46447/444164-46447574.pdf?src-supplier=Element14, ComponentLink3URL=https://datasheet.ciiva.com/46447/444164-46447574.pdf?src-supplier=Element14, ComponentLink4Description=https://datasheet.ciiva.com/2457/pyu-r-int-thick-7-2457045.pdf?src-supplier=Digi-Key, ComponentLink4URL=https://datasheet.ciiva.com/2457/pyu-r-int-thick-7-2457045.pdf?src-supplier=Digi-Key, ComponentLink5Description=https://datasheet.ciiva.com/2457/pyu-r-int-thick-7-2457046.pdf?src-supplier=Digi-Key, ComponentLink5URL=https://datasheet.ciiva.com/2457/pyu-r-int-thick-7-2457046.pdf?src-supplier=Digi-Key, ComponentLink6Description=https://datasheet.ciiva.com/12667/rc0805-12667371.pdf?src-supplier=Mouser, ComponentLink6URL=https://datasheet.ciiva.com/12667/rc0805-12667371.pdf?src-supplier=Mouser, Composition="Thick Film", Depth=1.25mm, Features="Moisture Resistant", Height=0.024inch, Lead Free="Lead Free", Length=0.079inch, Manufacturer Part Number=RC0805FR-0722RL, Military Standard=Not, Number of Terminations=2, Packaging="Tape and Reel", Power Rating=125mW, Pricing 1="1=0,10000, 10=0,03900, 100=0,01570, 1000=0,00705, 2500=0,00612 (USD)", REACH SVHC=Unknown, Resistance=22R, RoHS=Yes, Stock 1=751147, Supplier 1=Digi-Key, Termination=SMD/SMT, Width=0.049inch, Working Voltage=150V
R5 R9 R17: library part RES, "CR0805 SMD Thick Film Resistor,1 Kilohms,Pwr-Rtg 0.125 W,Tol 1%,SMT", Package="0805 Bourns", Check_prices=https://www.snapeda.com/parts/CR0805-FX-1001ELF/Bourns/view-part/?ref=eda, MF=Bourns, MP=CR0805-FX-1001ELF, SnapEDA_Link=https://www.snapeda.com/parts/CR0805-FX-1001ELF/Bourns/view-part/?ref=snap
R6 R10 R11 R12 R13 R14 R19 R20: library part RC0805FR-071KL, "RESISTOR, 0805 1K 1%, FULL REEL; Product Range:YAGEO - RC Series; Resistance:1kohm; Power Rating:125mW; Resistance Tolerance:± 1%; Resistor Case Style:0805 [2012 Metric]; Resistor Element Material:Thick Film; Temperature Coefficient:± 250ppm/°C; Voltage Rating:150V; Packaging:Tape & Reel; MSL:-; SVHC:No SVHC (16-Dec-2013); External Depth:0.55mm; External Length / Height:2mm; External Width:1.25mm; No. of Pins:2; Operating Temperature Max:155°C; Operating Temperature Min:-55°C; Operating Temperature Range:-55°C to +155°C; Reel Quantity:5000; Resistor Mounting:SMD; Series:RC12H; Temperature Coef", Case Code (Imperial)=0805, Case Code (Metric)=2012, Manufacturer=Yageo, Max Operating Temperature=155°C, Max Power Dissipation=125mW, Min Operating Temperature=-55°C, Package Quantity=1, Resistance=1kR, Supplier Part Number 1=311-1.00KCRCT-ND, Temperature Coefficient=100ppm/°C, Tolerance=1%, Voltage Rating=150V, Case/Package=0805, Category="Chip SMD Resistors", ComponentLink1Description=https://datasheet.ciiva.com/2456/pyu-r-int-thick-7-2456976.pdf?src-supplier=Digi-Key, ComponentLink1URL=https://datasheet.ciiva.com/2456/pyu-r-int-thick-7-2456976.pdf?src-supplier=Digi-Key, ComponentLink2Description=https://datasheet.ciiva.com/2456/pyu-r-int-thick-7-2456977.pdf?src-supplier=Digi-Key, ComponentLink2URL=https://datasheet.ciiva.com/2456/pyu-r-int-thick-7-2456977.pdf?src-supplier=Digi-Key, ComponentLink3Description=https://datasheet.ciiva.com/7941/1686128-7941719.pdf?src-supplier=Element14, ComponentLink3URL=https://datasheet.ciiva.com/7941/1686128-7941719.pdf?src-supplier=Element14, ComponentLink4Description=https://datasheet.ciiva.com/16850/rc0805-16850409.pdf?src-supplier=Future+Electronics, ComponentLink4URL=https://datasheet.ciiva.com/16850/rc0805-16850409.pdf?src-supplier=Future+Electronics, ComponentLink5Description=https://datasheet.ciiva.com/46385/444164-46385020.pdf?src-supplier=Element14, ComponentLink5URL=https://datasheet.ciiva.com/46385/444164-46385020.pdf?src-supplier=Element14, ComponentLink6Description=https://datasheet.ciiva.com/2456/pyu-r-int-thick-7-2456975.pdf?src-supplier=Digi-Key, ComponentLink6URL=https://datasheet.ciiva.com/2456/pyu-r-int-thick-7-2456975.pdf?src-supplier=Digi-Key, Composition="Thick Film", Depth=1.25mm, Features="Moisture Resistant", Height=0.024inch, Lead Free="Lead Free", Length=0.079inch, Manufacturer Part Number=RC0805FR-071KL, Military Standard=Not, Number of Pins=2, Number of Terminations=2, Packaging="Tape and Reel", Power Rating=125mW, Pricing 1="1=0,10000, 10=0,03900, 100=0,01570, 1000=0,00705, 2500=0,00612 (USD)", REACH SVHC=Unknown, RoHS=Yes, Stock 1=17484897, Supplier 1=Digi-Key, Termination=SMD/SMT, Voltage Rating (DC)=150V, Width=0.049inch
R16 R18: library part RC0805FR-071ML, "Res Thick Film 0805 1M Ohm 1% 0.125W(1/8W) ±100ppm/C Epoxy SMD T/R", Case/Package=0805, Manufacturer="Yageo Phycomp", Max Operating Temperature=155°C, Min Operating Temperature=-55°C, Power Rating=125mW, Resistance=1MR, Supplier Part Number 1=311-1.00MCRDKR-ND, Temperature Coefficient=100ppm/°C, Tolerance=1%, Voltage Rating (DC)=150V, Category="Chip SMD Resistors", ComponentLink1Description=http://www.farnell.com/datasheets/2167052.pdf?src-supplier=Farnell, ComponentLink1URL=http://www.farnell.com/datasheets/2167052.pdf?src-supplier=Farnell, ComponentLink2Description=http://www.mouser.com/ds/2/447/Yageo_08112016_RC0805-968729.pdf?src-supplier=Mouser, ComponentLink2URL=http://www.mouser.com/ds/2/447/Yageo_08112016_RC0805-968729.pdf?src-supplier=Mouser, ComponentLink3Description=http://www.farnell.com/datasheets/444164.pdf?src-supplier=Element14, ComponentLink3URL=http://www.farnell.com/datasheets/444164.pdf?src-supplier=Element14, ComponentLink4Description=http://www.farnell.com/datasheets/2167052.pdf?src-supplier=Newark, ComponentLink4URL=http://www.farnell.com/datasheets/2167052.pdf?src-supplier=Newark, ComponentLink5Description=http://www.yageo.com/documents/recent/PYu-RC_Group_51_RoHS_L_10.pdf?src-supplier=Digi-Key, ComponentLink5URL=http://www.yageo.com/documents/recent/PYu-RC_Group_51_RoHS_L_10.pdf?src-supplier=Digi-Key, Depth=1.25mm, Height=0.5mm, Lead Free="Lead Free", Length=2mm, Manufacturer Part Number=RC0805FR-071ML, Mount="Surface Mount", Number of Pins=2, Packaging="Cut Tape", Pricing 1="1=0,10000, 10=0,03900, 100=0,01570, 1000=0,00705, 2500=0,00612 (USD)", REACH SVHC="No SVHC", RoHS=Yes, Stock 1=3012562, Supplier 1=Digi-Key, Width=1.25mm
RESET: library part 1825910-6, "SWITCH TACTILE SPST-NO 0.05A 24V", Contact Current Rating=50mA, Contact Resistance=100mR, Manufacturer="TE Connectivity Alcoswitch", Max Operating Temperature=85°C, Max Voltage Rating (DC)=24V, Min Operating Temperature=-35°C, Operating Force=160gf, Package Quantity=750, Supplier Part Number 1=450-1650-ND, Actuator Length=0.055inch, Actuator Material=PBT, Actuator Type=Standard, Category="Pushbutton Switches", ComponentLink1Description=https://datasheet.ciiva.com/30199/1825910-6rqpn1825910-6-30199520.pdf?src-supplier=Onlinecomponents.com, ComponentLink1URL=https://datasheet.ciiva.com/30199/1825910-6rqpn1825910-6-30199520.pdf?src-supplier=Onlinecomponents.com, ComponentLink2Description=https://datasheet.ciiva.com/15184/getdatasheetpartid-395915-15184509.pdf?src-supplier=Verical, ComponentLink2URL=https://datasheet.ciiva.com/15184/getdatasheetpartid-395915-15184509.pdf?src-supplier=Verical, Contact Material="Copper Alloy", Contact Plating=Silver, Electrical Life=100000Cycles, ELV=Compliant, Illumination Type=Non-Illuminated,Illuminated, Lead Free="Lead Free", Length=5.99mm, Manufacturer Part Number=1825910-6, Max Current Rating=50mA, Mechanical Life=100000Cycles, Mount="Through Hole", Orientation=Straight, Packaging="Loose Piece", Pricing 1="1=0,10000, 10=0,10100, 25=0,09560, 100=0,08700, 250=0,08180, 500=0,07484, 1000=0,06265, 2500=0,06092, 5000=0,05743 (USD)", REACH SVHC=Unknown, RoHS=Yes, Stock 1=97530, Supplier 1=Digi-Key, Switch Function=Off-Mom, Switch Travel=0.25mm, Termination="PC Pins", Throw Configuration=SPST, Type=Switch
U1: "IC OPAMP GP 8DIP", Package="PDIP-8 Texas", Check_prices=https://www.snapeda.com/parts/LM358N/STMicroelectronics/view-part/?ref=eda, MF=STMicroelectronics, MP=LM358N, SnapEDA_Link=https://www.snapeda.com/parts/LM358N/STMicroelectronics/view-part/?ref=snap
U2: "Voltage Regulators, LDO, 3.3V ADJ 800mA", Package="SOT-223-4 ON Semiconductor", Check_prices=https://www.snapeda.com/parts/MC33269ST-3.3T3G/Onsemi/view-part/?ref=eda, MF="ON Semiconductor", MP=MC33269ST-3.3T3G, SnapEDA_Link=https://www.snapeda.com/parts/MC33269ST-3.3T3G/Onsemi/view-part/?ref=snap
U3: "Linear Voltage Regulator IC Positive Adjustable 1 Output 800mA 8-SOIC", Package="SOIC-8 ON Semiconductor", Check_prices=https://www.snapeda.com/parts/MC33269DG/Onsemi/view-part/?ref=eda, MF="ON Semiconductor", MP=MC33269DG, SnapEDA_Link=https://www.snapeda.com/parts/MC33269DG/Onsemi/view-part/?ref=snap
U4: "150-mA, 16-V, low-dropout voltage regulator with enable", Package="SOT-23-5 Texas Instruments", Check_prices=https://www.snapeda.com/parts/LP2985-33DBVR/Texas+Instruments/view-part/?ref=eda, MF="Texas Instruments", MP=LP2985-33DBVR, SnapEDA_Link=https://www.snapeda.com/parts/LP2985-33DBVR/Texas+Instruments/view-part/?ref=snap
U5: "MICROCHIP - ATMEGA16U2-AU - MCU, 8BIT, MEGAAVR, 16MHZ, TQFP-32", Case/Package=A, Frequency=16MHz, Manufacturer="Microchip / Atmel", Max Operating Temperature=85°C, Max Supply Voltage=5.5V, Min Operating Temperature=-40°C, Min Supply Voltage=2.7V, Package Quantity=1250, Supplier Part Number 1=ATMEGA16U2-AU-ND, Category=Microcontrollers, ComponentLink1Description=https://datasheet.ciiva.com/13036/doc7799-28769-13036800.pdf?src-supplier=Mouser, ComponentLink1URL=https://datasheet.ciiva.com/13036/doc7799-28769-13036800.pdf?src-supplier=Mouser, ComponentLink2Description=https://datasheet.ciiva.com/22651/doc7799-22651110.pdf?src-supplier=Farnell, ComponentLink2URL=https://datasheet.ciiva.com/22651/doc7799-22651110.pdf?src-supplier=Farnell, Contact Plating=Tin,Matte, Core Architecture=AVR, Data Bus Width=8b, Height=1.05mm, Interface=SPI,UART,USB,USART,Serial, Lead Free="Lead Free", Length=7mm, Manufacturer Part Number=ATMEGA16U2-AU, Max Frequency=16MHz, Memory Size=16KB, Memory Type=FLASH, Mount="Surface Mount", Number of I/Os=22, Number of Pins=32, Number of Programmable I/O=22, Number of PWM Channels=5, Number of SPI Channels=1, Number of Timers/Counters=2, Oscillator Type=Internal, Packaging=Tray, Peripherals="Brown-out Detect/Reset,POR,PWM,WDT", Pricing 1="1=2,45000, 25=2,25000, 100=2,04000 (USD)", RAM Size=512B, REACH SVHC="No SVHC", RoHS=Yes, Stock 1=898, Supplier 1=Digi-Key, Watchdog Timer=Yes, Width=7mm
U6: "ATMEGA328P-PU; 8 bit Microcontroller AVR 20MHz 1; 32kb Flash; 2kb RAM; I2C SPI 2", Case/Package=PDIP, Frequency=20MHz, Manufacturer="Microchip / Atmel", Max Operating Temperature=85°C, Max Supply Voltage=5.5V, Min Operating Temperature=-40°C, Min Supply Voltage=1.8V, Package Quantity=14, Supplier Part Number 1=ATMEGA328P-PU-ND, Category=Microcontrollers, ComponentLink1Description=https://datasheet.ciiva.com/20168/73-4283-20168380.pdf?src-supplier=Rapid+Electronics, ComponentLink1URL=https://datasheet.ciiva.com/20168/73-4283-20168380.pdf?src-supplier=Rapid+Electronics, ComponentLink2Description=https://datasheet.ciiva.com/19457/2139111-19457070.pdf?src-supplier=Jameco, ComponentLink2URL=https://datasheet.ciiva.com/19457/2139111-19457070.pdf?src-supplier=Jameco, ComponentLink3Description=https://datasheet.ciiva.com/1157/1684409-1157696.pdf?src-supplier=Element14, ComponentLink3URL=https://datasheet.ciiva.com/1157/1684409-1157696.pdf?src-supplier=Element14, ComponentLink4Description=https://datasheet.ciiva.com/26818/atmega328p-pu-26818578.pdf?src-supplier=IIIC, ComponentLink4URL=https://datasheet.ciiva.com/26818/atmega328p-pu-26818578.pdf?src-supplier=IIIC, ComponentLink5Description=https://datasheet.ciiva.com/29119/155197-da-01-en-microcontr-atmega328p-pu-8bit-pdip-28-29119593.pdf?src-supplier=Conrad, ComponentLink5URL=https://datasheet.ciiva.com/29119/155197-da-01-en-microcontr-atmega328p-pu-8bit-pdip-28-29119593.pdf?src-supplier=Conrad, ComponentLink6Description=https://datasheet.ciiva.com/15213/getdatasheetpartid-318533-15213133.pdf?src-supplier=Verical, ComponentLink6URL=https://datasheet.ciiva.com/15213/getdatasheetpartid-318533-15213133.pdf?src-supplier=Verical, Contact Plating=Tin,Matte, Core Architecture=AVR, Data Bus Width=8b, Height=3.28mm, Interface=I2C,SPI,UART,USART,2-Wire, Lead Free="Lead Free", Length=37.4mm, Manufacturer Part Number=ATMEGA328P-PU, Max Frequency=20MHz, Memory Size=32KB, Memory Type=FLASH, Mount="Through Hole", Number of ADC Channels=6, Number of I2C Channels=1, Number of I/Os=23, Number of Pins=28, Number of Programmable I/O=23, Number of PWM Channels=6, Number of SPI Channels=1, Number of Timers/Counters=3, Oscillator Type=Internal, Packaging=Rail/Tube, Peripherals="Brown-out Detect/Reset,POR,PWM,WDT", Pricing 1="1=2,08000, 25=1,91000, 100=1,73000 (USD)", Radiation Hardening=No, RAM Size=2KB, REACH SVHC="No SVHC", RoHS=Yes, Stock 1=5280, Supplier 1=Digi-Key, Watchdog Timer=Yes, Width=6.76mm
Y1 Y2: "CRYSTAL 16.0000MHZ 18PF SMD", Case/Package=CSMD, ESR (Equivalent Series Resistance)=50R, Frequency=16MHz, Frequency Stability=30ppm, Frequency Tolerance=20ppm, Load Capacitance=18pF, Manufacturer=Abracon, Max Operating Temperature=85°C, Min Operating Temperature=-40°C, Package Quantity=1000, Supplier Part Number 1=535-9840-1-ND, Category=Crystals, ComponentLink1Description=https://datasheet.ciiva.com/15116/getdatasheetpartid-721624-15116835.pdf?src-supplier=Verical, ComponentLink1URL=https://datasheet.ciiva.com/15116/getdatasheetpartid-721624-15116835.pdf?src-supplier=Verical, ComponentLink2Description=https://datasheet.ciiva.com/22658/947971-22658293.pdf?src-supplier=Element14, ComponentLink2URL=https://datasheet.ciiva.com/22658/947971-22658293.pdf?src-supplier=Element14, ComponentLink3Description=https://datasheet.ciiva.com/5788/abm7-5788054.pdf?src-supplier=Farnell, ComponentLink3URL=https://datasheet.ciiva.com/5788/abm7-5788054.pdf?src-supplier=Farnell, ComponentLink4Description=https://datasheet.ciiva.com/7998/947971-7998600.pdf?src-supplier=Element14, ComponentLink4URL=https://datasheet.ciiva.com/7998/947971-7998600.pdf?src-supplier=Element14, ComponentLink5Description=https://datasheet.ciiva.com/46385/947971-46385243.pdf?src-supplier=Element14, ComponentLink5URL=https://datasheet.ciiva.com/46385/947971-46385243.pdf?src-supplier=Element14, ComponentLink6Description=https://datasheet.ciiva.com/16383/abm7-16383174.pdf?src-supplier=Future+Electronics, ComponentLink6URL=https://datasheet.ciiva.com/16383/abm7-16383174.pdf?src-supplier=Future+Electronics, ComponentLink7Description=https://datasheet.ciiva.com/18649/abm7-18649865.pdf?src-supplier=Digi-Key, ComponentLink7URL=https://datasheet.ciiva.com/18649/abm7-18649865.pdf?src-supplier=Digi-Key, ComponentLink8Description=https://datasheet.ciiva.com/18649/abm7-18649866.pdf?src-supplier=Digi-Key, ComponentLink8URL=https://datasheet.ciiva.com/18649/abm7-18649866.pdf?src-supplier=Digi-Key, ComponentLink9Description=https://datasheet.ciiva.com/18649/abm7-18649867.pdf?src-supplier=Digi-Key, ComponentLink9URL=https://datasheet.ciiva.com/18649/abm7-18649867.pdf?src-supplier=Digi-Key, ComponentLink10Description=https://datasheet.ciiva.com/26941/getdatasheetpartid-719818-26941724.pdf?src-supplier=Verical, ComponentLink10URL=https://datasheet.ciiva.com/26941/getdatasheetpartid-719818-26941724.pdf?src-supplier=Verical, Composition=Ceramic, Depth=3.5mm, Height=0.055inch, Lead Free="Lead Free", Length=6mm, Manufacturer Part Number=ABM7-16.000MHZ-D2Y-T, Mount="Surface Mount", Number of Pins=2, Packaging="Tape and Reel", Pricing 1="1=1,00000, 10=0,88600, 50=0,82780, 100=0,73150, 500=0,69300 (USD)", Radiation Hardening=No, REACH SVHC=Unknown, RoHS=Yes, Stock 1=61578, Supplier 1=Digi-Key, Termination=SMD/SMT, Tolerance=20ppm, Width=3.3mm
Z1 Z2: "VARISTOR 0603", Capacitance=0.5pF, Case Code (Imperial)=0603, Case Code (Metric)=1608, Clamping Voltage=20V, Current Rating=50nA, Manufacturer=Bourns, Max Operating Temperature=85°C, Max Voltage Rating (DC)=5V, Min Operating Temperature=-40°C, Package Quantity=1, Supplier Part Number 1=CG0603MLC-05ECT-ND, Voltage Rating (AC)=8V, Case/Package=0603, Category=Varistors, ComponentLink1Description=https://datasheet.ciiva.com/27747/1163231-27747629.pdf?src-supplier=Jameco, ComponentLink1URL=https://datasheet.ciiva.com/27747/1163231-27747629.pdf?src-supplier=Jameco, ComponentLink2Description=https://datasheet.ciiva.com/30070/mlc-30070503.pdf?src-supplier=Onlinecomponents.com, ComponentLink2URL=https://datasheet.ciiva.com/30070/mlc-30070503.pdf?src-supplier=Onlinecomponents.com, ComponentLink3Description=https://datasheet.ciiva.com/6991/mlc-6991832.pdf?src-supplier=Digi-Key, ComponentLink3URL=https://datasheet.ciiva.com/6991/mlc-6991832.pdf?src-supplier=Digi-Key, ComponentLink4Description=https://datasheet.ciiva.com/6991/mlc-6991834.pdf?src-supplier=Digi-Key, ComponentLink4URL=https://datasheet.ciiva.com/6991/mlc-6991834.pdf?src-supplier=Digi-Key, ComponentLink5Description=https://datasheet.ciiva.com/6991/mlc-6991836.pdf?src-supplier=Digi-Key, ComponentLink5URL=https://datasheet.ciiva.com/6991/mlc-6991836.pdf?src-supplier=Digi-Key, ComponentLink6Description=https://datasheet.ciiva.com/1278/1785244-1278701.pdf?src-supplier=Element14, ComponentLink6URL=https://datasheet.ciiva.com/1278/1785244-1278701.pdf?src-supplier=Element14, ComponentLink7Description=https://datasheet.ciiva.com/22696/1785244-22696318.pdf?src-supplier=Element14, ComponentLink7URL=https://datasheet.ciiva.com/22696/1785244-22696318.pdf?src-supplier=Element14, ComponentLink8Description=https://datasheet.ciiva.com/25958/mlc-25958222.pdf?src-supplier=Avnet+Europe, ComponentLink8URL=https://datasheet.ciiva.com/25958/mlc-25958222.pdf?src-supplier=Avnet+Europe, ComponentLink9Description=https://datasheet.ciiva.com/8084/mlc-8084047.pdf?src-supplier=Avnet, ComponentLink9URL=https://datasheet.ciiva.com/8084/mlc-8084047.pdf?src-supplier=Avnet, Contact Plating=Tin, Depth=0.8mm, Element Configuration=Single, Leakage Current=50nA, Length=1.6mm, Manufacturer Part Number=CG0603MLC-05E, Number of Channels=1, Number of Circuits=1, Number of Pins=2, Operating Supply Voltage=5V, Packaging="Tape and Reel", Pricing 1="1=0,10000, 25=0,06600, 100=0,06430 (USD)", Radiation Hardening=No, REACH SVHC="No SVHC", RoHS=Yes, Stock 1=111155, Supplier 1=Digi-Key, Termination=SMD/SMT, Thickness=0.8mm, Turn-On Delay Time=1ns, Voltage=5V, Voltage Rating (DC)=5V, Width=0.8mm, Working Voltage=5V

## Via types
v1: diameter 50, hole 28, Top Layer to Bottom Layer, 29 vias

## Nets (pads, with @x,y where several pads share a name; then routed paths per layer and width w, separated by ;. In a path a pad name is that pad's centre, name@x,y a point inside that pad or via, vN(x,y) a via of type N, cw(c..) or ccw(c..) an arc to the next point about the centre after c; other vN are vias at no path point)
+3V3: C5.2 P1.5 U1.2 U4.5 | length 3144.1
  Top Layer w10: C5.2 2827.4,2220 2930,2220 2970,2180 U1.2 3053,2127 3140,2127 3155.2,2111.8 U4.5
  Bottom Layer w10: U1.2 2960,2140 2960,2130 2950,2120 2782,2120 2714,2188 2714,2497 2670,2541 2551,2541 2526,2516 2526,1909.59 2635.59,1800 2635.59,1764.41 2653,1747 3567,1747 P1.5
AREF: C7.1 P2.1 U6.21 | length 3410.6
  Top Layer w10: P2.1 3158,3793 3200,3793 3245,3748 3245,3695 3302,3638 3368,3638 v1(3472,3534) ; C7.1 3882.4,2032.4 3930,2080 U6.21
  Bottom Layer w10: v1(3472,3534) 3472,3237 3386.2,3151.2 3024.2,3151.2 2989,3116 2989,2560 3029,2520 3223,2520 3243,2500 3243,2379 3260,2362 3888,2362 3930,2320 U6.21
CON_USB_N: J3.3 R4.1 Z1.1 | length 550.4
  Top Layer w10: v1(2352,3052) 2363.06,3040.94 Z1.1 2580,2993.6 2582.6,2991 R4.1
  Bottom Layer w10: v1(2352,3052) 2352,3212 J3.3
CON_USB_P: J3.2 R7.1 Z2.1 | length 202.7
  Top Layer w10: J3.2 2526,3255 2526.94,3254.06 Z2.1 2580,3301 2580.2,3301.2 R7.1